# EAGLE board Panteleev (EAGLE 7.7.0)
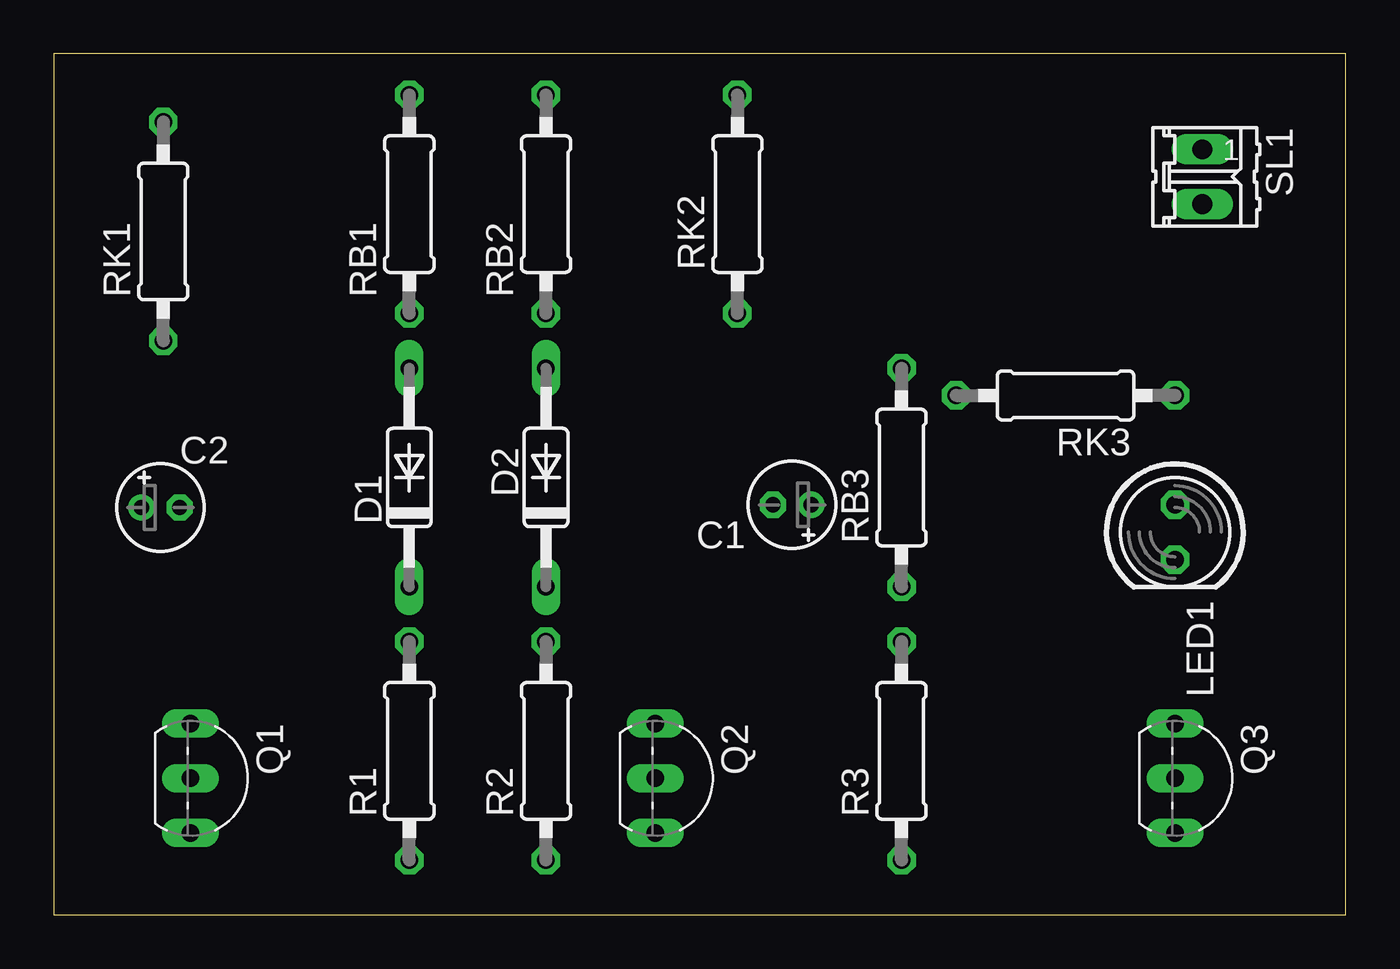
[diagram p0: board, top side]
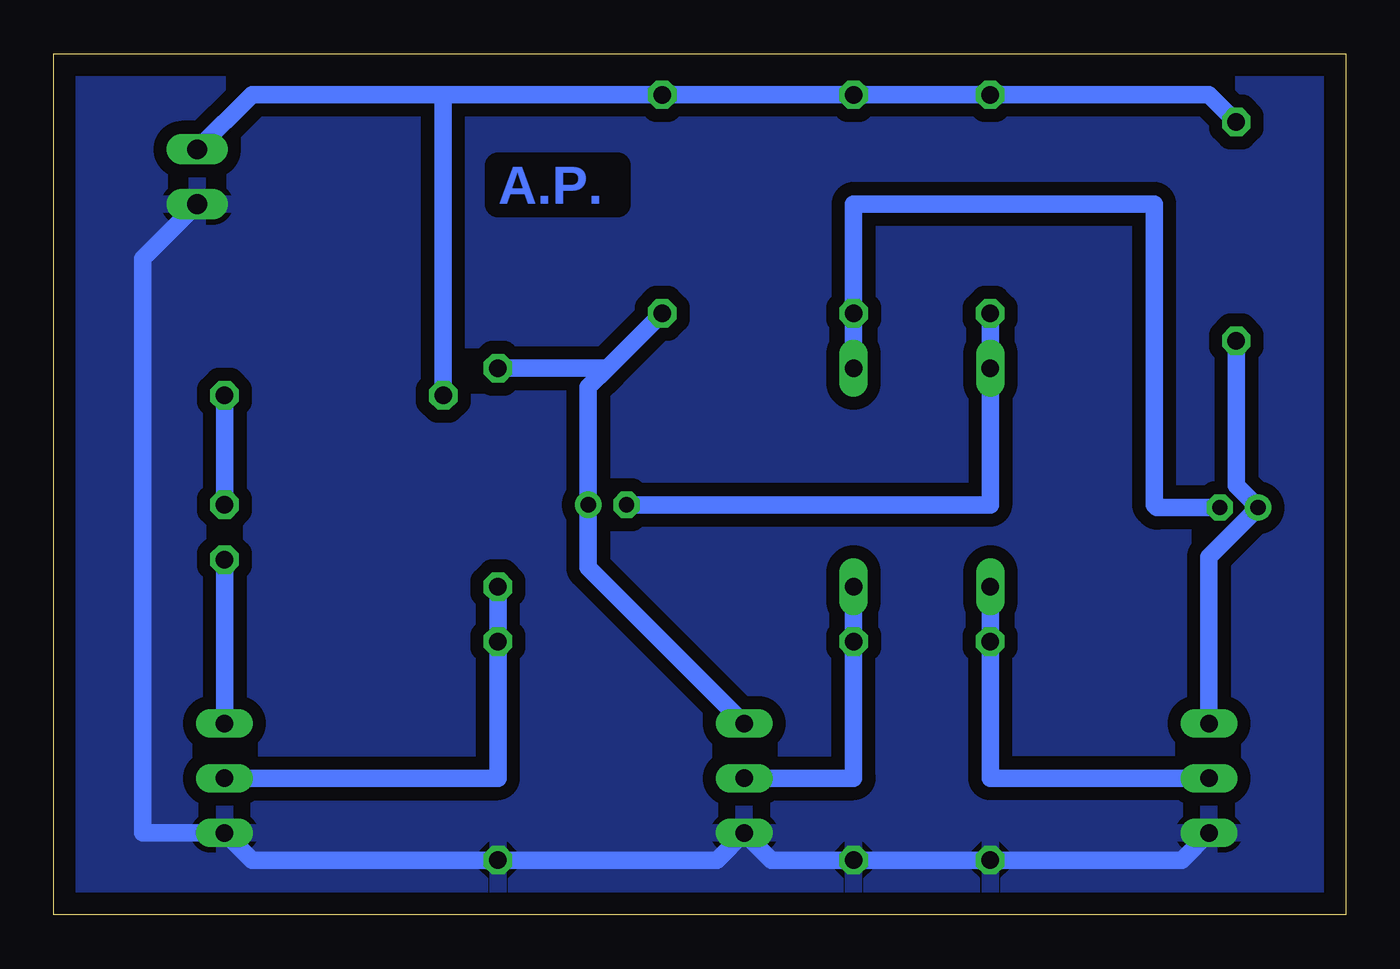
[diagram p1: board, bottom side, seen from below]

Size 60 x 40 mm. Coordinates in mm from the lower left corner, seen from the top.
Outline: 0,0 60,0 60,40 0,40 0,0
Copper layers (1*16): Top 0.035mm / dielectric 1.5mm / Bottom 0.035mm
Design rules "default *": minimum track width 6mil, minimum drill 0.35mm, track to track 6mil, track to pad 6mil, pad to pad 6mil, via to via 6mil, smd to smd 6mil, copper to edge 40mil, drill to drill 6mil, minimum pad ring 10mil, minimum via ring 8mil, stop-mask expansion 4mil, vias tented up to drill 0mil, thermal gap 10mil

## Footprints (pad centres in the part's own frame; a part is rotated, then mirrored left to right if it is on the bottom)
E1,8-4 = drill 0.711 pad 1.168: + -0.889,0 | drill 0.711 pad 1.168 octagon: - 0.889,0
DO35-10 = drill 0.813 long: A 5.08,0; C -5.08,0
LED5MM = drill 0.813 octagon: A -1.27,0; K 1.27,0
TO92-EBC = drill 0.813 long: B 0,-1.27; C -2.54,-1.27; E 2.54,-1.27
0207/10 = drill 0.813 octagon: 1 -5.08,0; 2 5.08,0
02P = drill 0.914 long: 1 -1.27,0; 2 1.27,0

## Placement (x,y rotation side)
C1  4M7  [E1,8-4]  34.29,19.05 180 top
C2  4M7  [E1,8-4]  4.95,18.92 0 top
D1  1N4148DO35-10  [DO35-10]  16.51,20.32 90 top
D2  1N4148DO35-10  [DO35-10]  22.86,20.32 90 top
LED1  zlutá  [LED5MM]  52.07,17.78 270 top
Q1  BC546B  [TO92-EBC]  7.62,6.35 270 top
Q2  BC546B  [TO92-EBC]  29.21,6.35 270 top
Q3  BC546B  [TO92-EBC]  53.34,6.35 270 top
R1  1M  [0207/10]  16.51,7.62 90 top
R2  1M  [0207/10]  22.86,7.62 90 top
R3  22k  [0207/10]  39.37,7.62 90 top
RB1  180k  [0207/10]  16.51,33.02 90 top
RB2  180k  [0207/10]  22.86,33.02 90 top
RB3  56k  [0207/10]  39.37,20.32 90 top
RK1  3k3  [0207/10]  5.08,31.75 90 top
RK2  3k3  [0207/10]  31.75,33.02 90 top
RK3  1k  [0207/10]  46.99,24.13 180 top
SL1  VCC=15V  [02P]  53.34,34.29 270 top

## Library data of the parts
C1 C2 = rcl; SPICEPREFIX: C
D1 D2 = diode
LED1 = led
Q1-Q3 = transistor-npn
R1-R3 RB1-RB3 RK1-RK3 = rcl; SPICEPREFIX: R
SL1 = con-amp-quick; OC_FARNELL: unknown; OC_NEWARK: unknown

## Nets
GND: Q1.E Q2.E Q3.E R1.1 R2.1 R3.1 SL1.2
N$1: C2.+ Q1.C RK1.1
N$2: D1.C Q1.B R1.2
N$3: C2.- D2.A RB2.1
N$4: C1.- D1.A RB1.1
N$5: D2.C Q2.B R2.2
N$6: Q3.B R3.2 RB3.1
N$7: RB1.2 RB2.2 RK1.2 RK2.2 RK3.2 SL1.1
N$8: C1.+ Q2.C RB3.2 RK2.1
N$9: LED1.K Q3.C
N$10: LED1.A RK3.1

## Tracks (layer width: path | path; a pad name or v marks a point on that pad's centre or on a via)
GND
  Bottom 0.813: SL1.2 55.88,30.48 55.88,3.81 Q3.E 50.8,2.54 R3.1 29.21,2.54 Q2.E 26.67,2.54 R2.1 R1.1 7.62,2.54 Q1.E
  pour Bottom (isolate 0.61): 0,0 59.69,0 59.69,39.37 0,39.37
  pour Bottom (isolate 0.61): 0,0 59.69,0 59.69,39.37 0,39.37
N$1
  Bottom 0.813: RK1.1 5.08,19.94 C2.+ 6.35,16.64 Q1.C
N$2
  Bottom 0.813: D1.C R1.2 16.51,6.35 Q1.B
N$3
  Bottom 0.813: D2.A RB2.1 22.86,33.02 8.89,33.02 8.89,19.05 8.76,18.92 C2.-
N$4
  Bottom 0.813: RB1.1 D1.A 16.51,19.05 C1.-
N$5
  Bottom 0.813: D2.C R2.2 22.86,6.35 Q2.B
N$6
  Bottom 0.813: Q3.B 39.37,6.35 R3.2 RB3.1
N$7
  Bottom 0.813: RK1.2 6.35,38.1 RB1.2 RB2.2 RK2.2 41.91,38.1 | 41.91,38.1 50.8,38.1 SL1.1 | RK3.2 41.91,38.1
N$8
  Bottom 0.813: RK2.1 34.29,25.4 | 34.29,25.4 35.18,24.51 C1.+ 35.18,16.13 Q2.C | RB3.2 34.29,25.4
N$9
  Bottom 0.813: LED1.K Q3.C
N$10
  Bottom 0.813: RK3.1 LED1.A

## Text on the board
Bottom: A.P.